# Altium PCB PCB1.PcbDoc
Units mm, origin at the board's own origin, x right, y up, seen from the top; angles counter-clockwise.
Board outline 98.42 x 88.14 mm, 2 copper layers (Top Layer, Bottom Layer); 25 components, 40 nets, 123 pads, 4 vias.
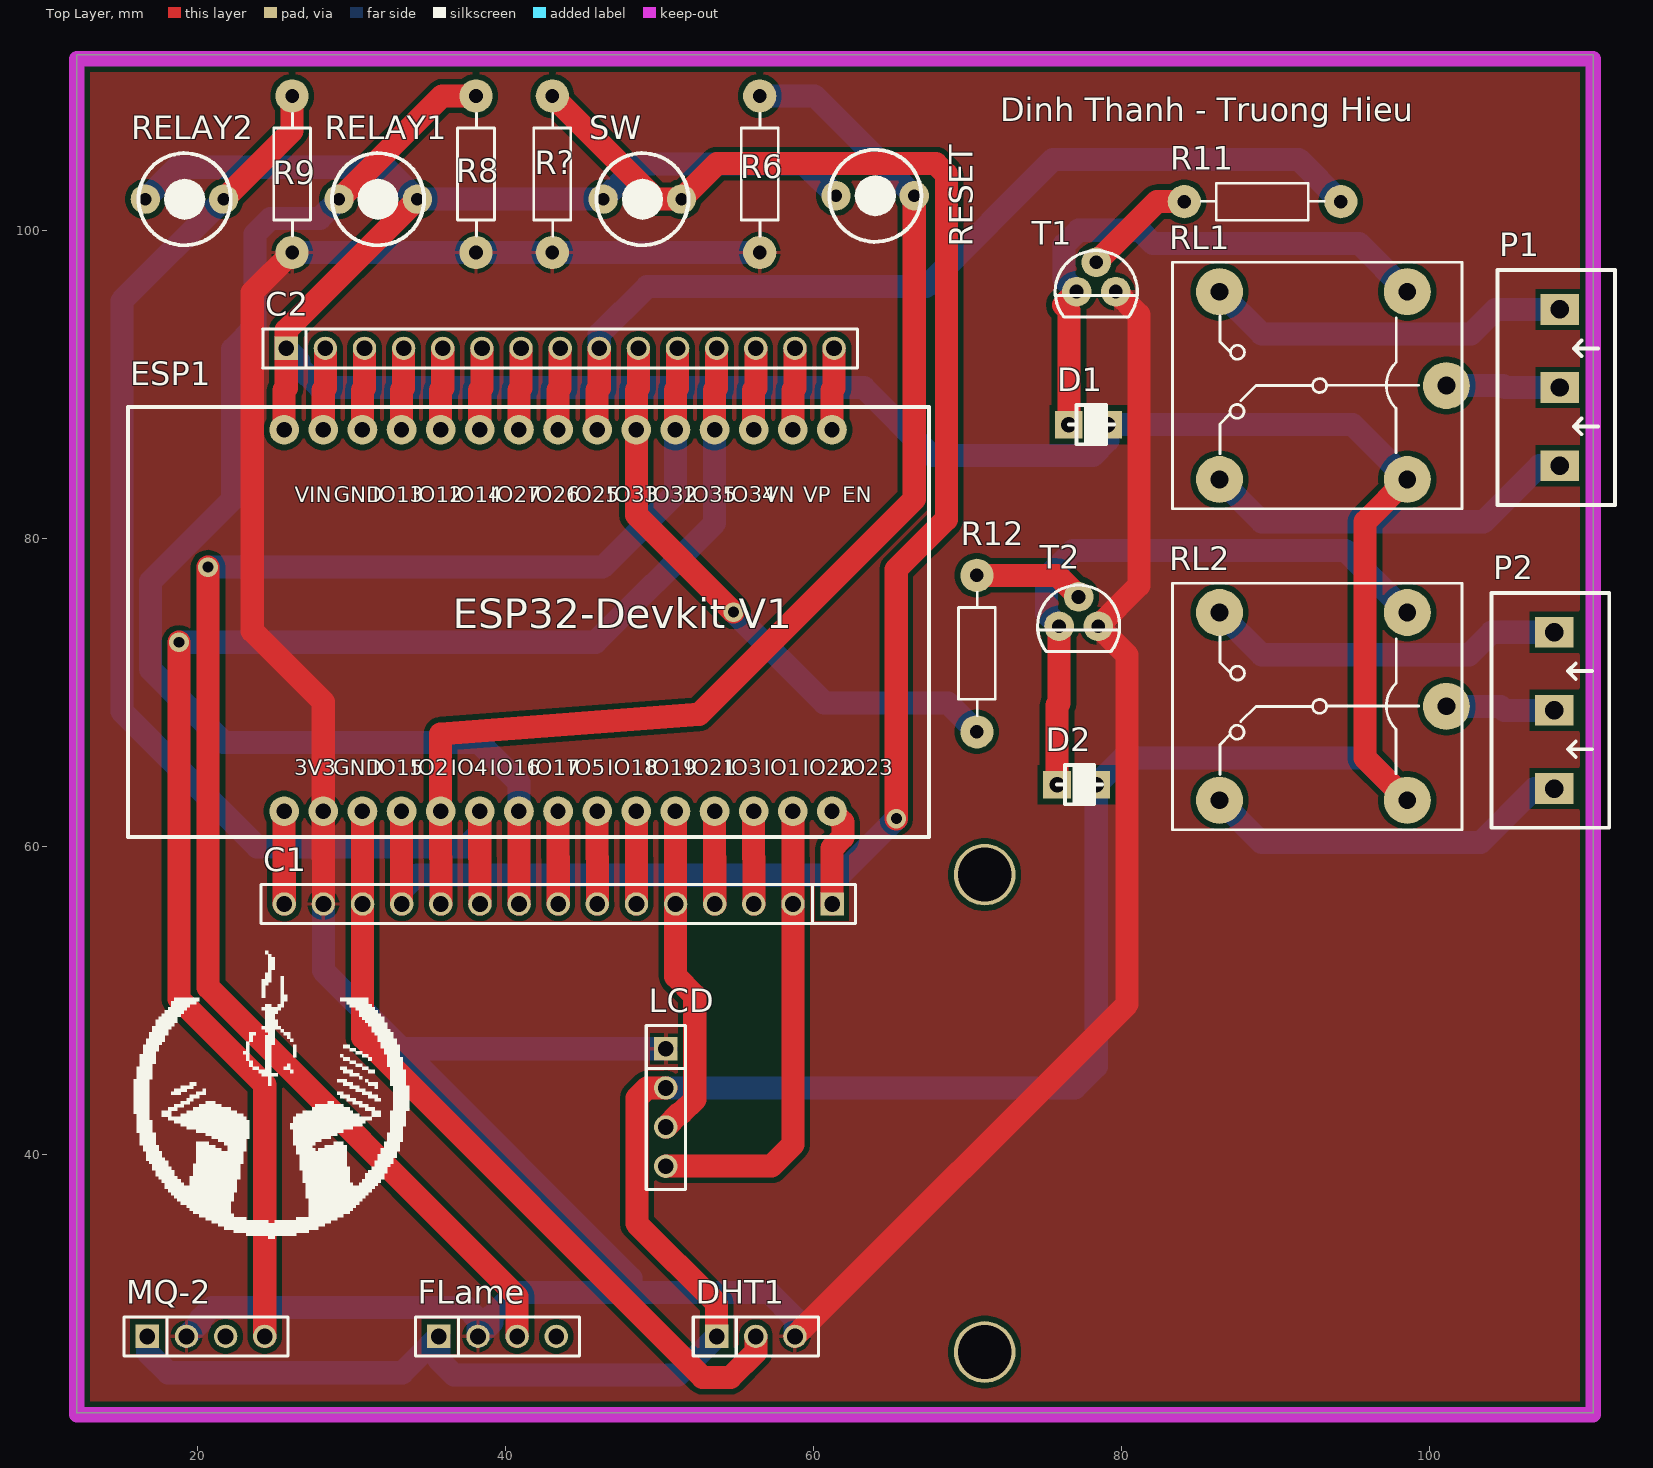
[diagram p0: Top Layer view]
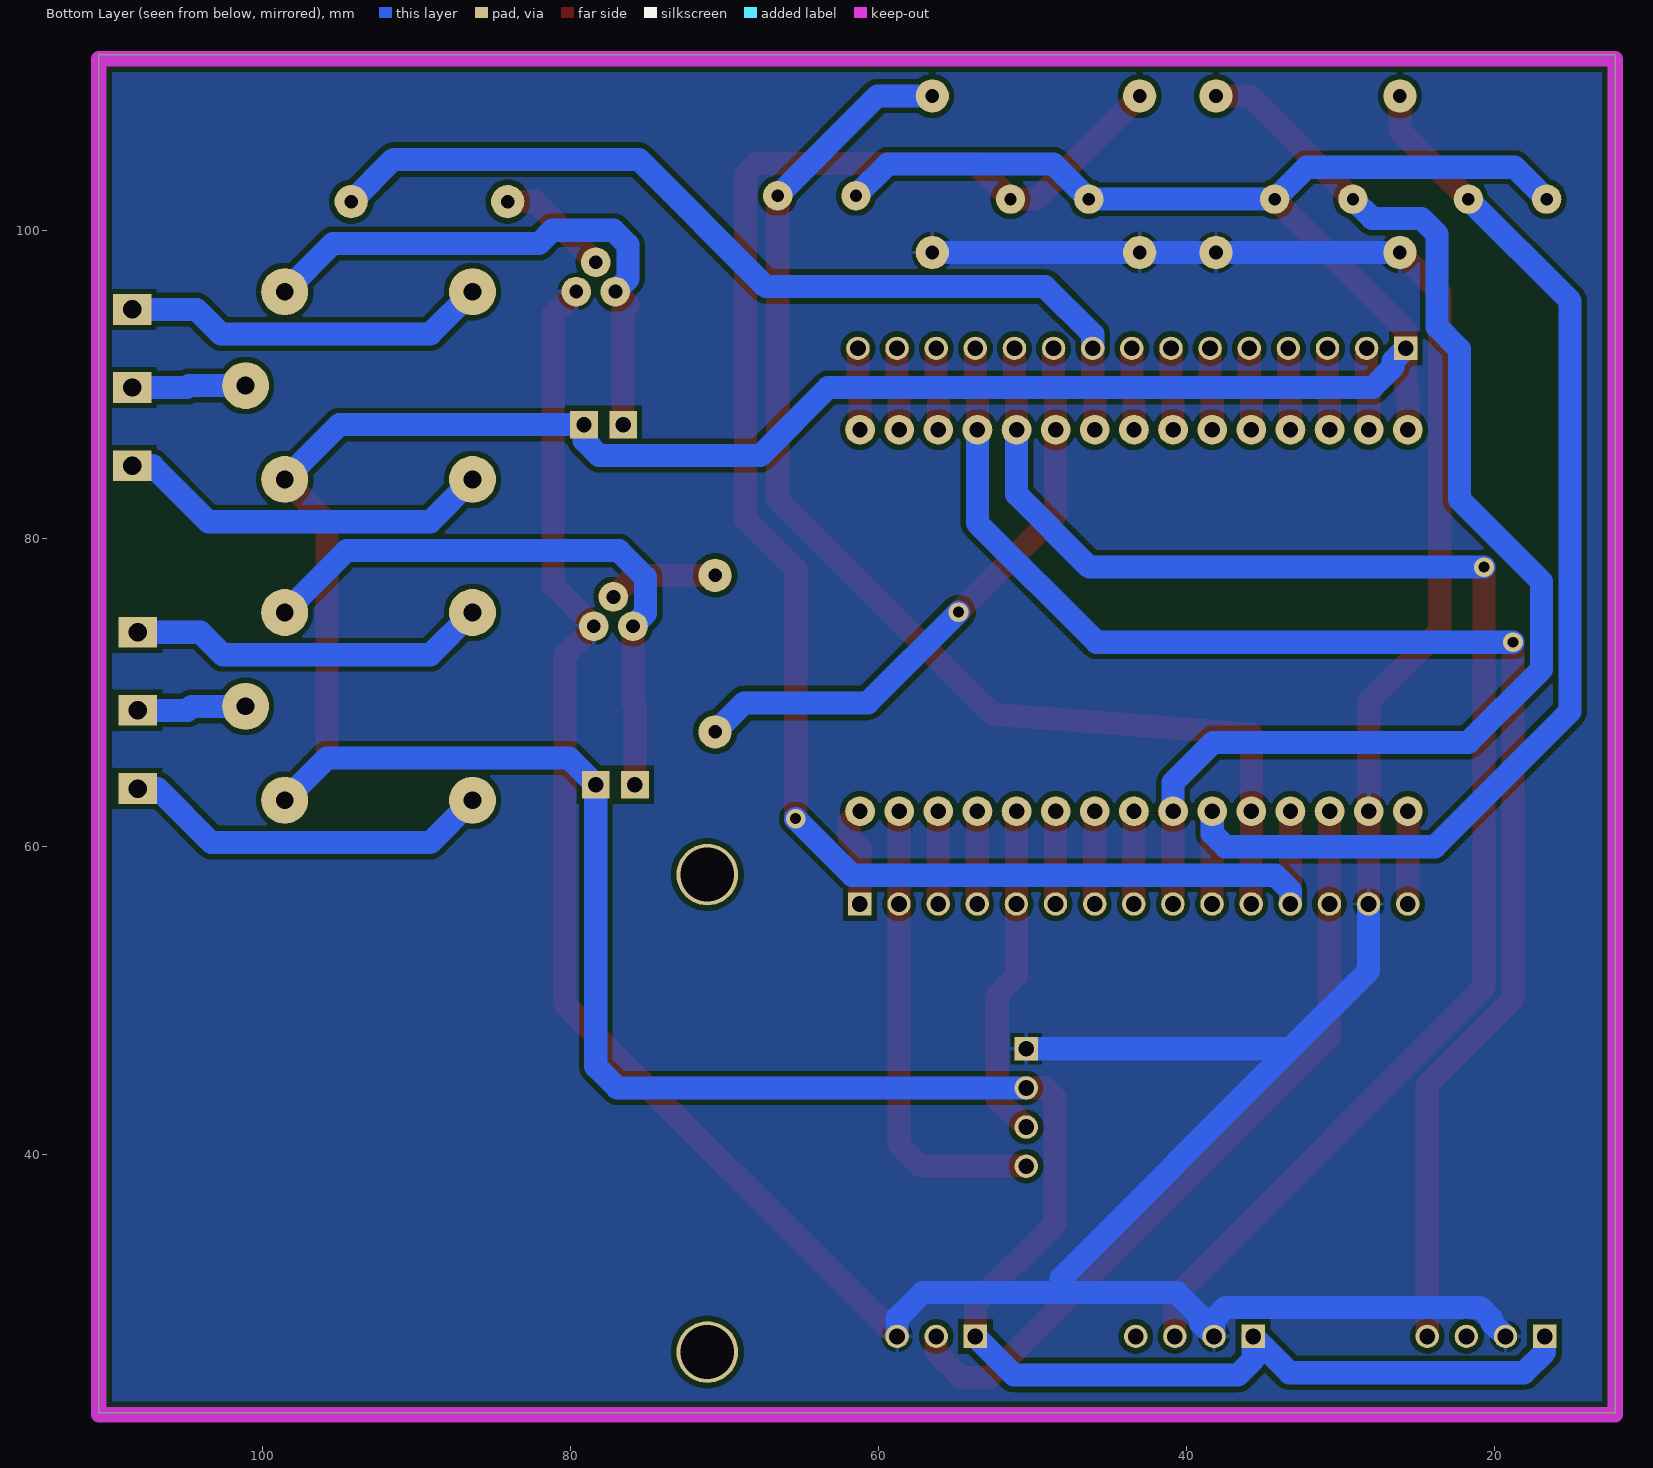
[diagram p1: Bottom Layer view, seen from below]
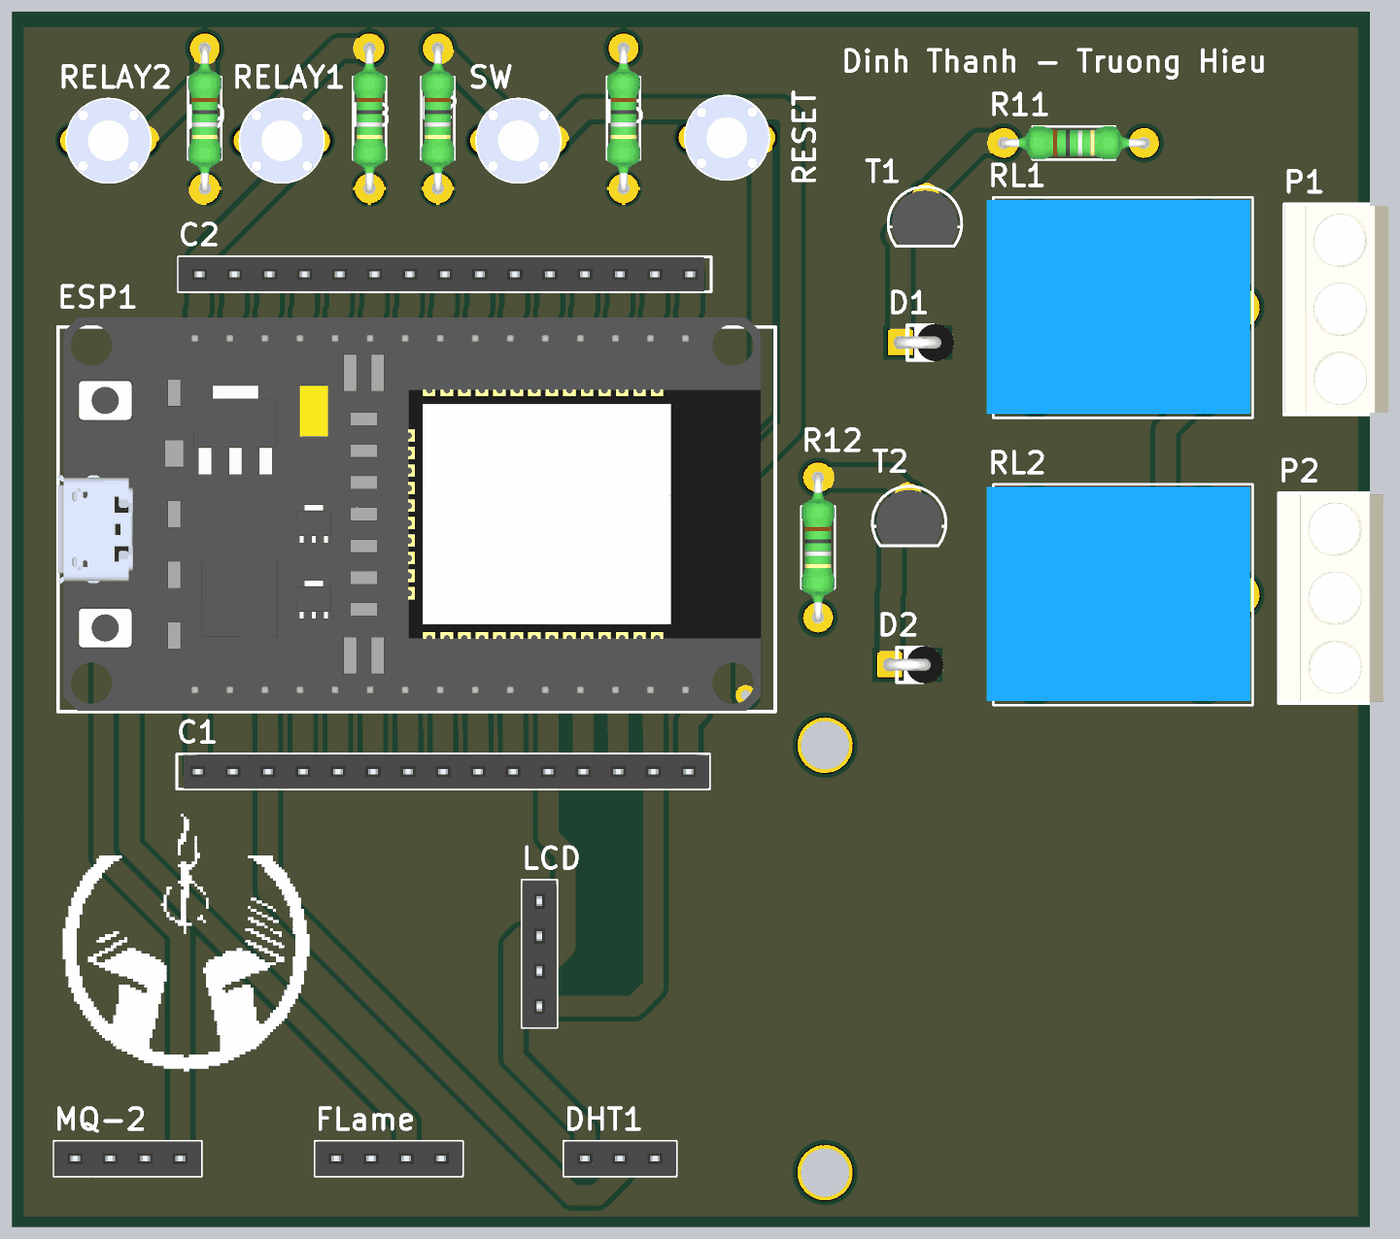
[diagram p2: 3D render of the assembled board from above, using the file's embedded part models]

## Layer stack, top to bottom
Top Solder: solder mask 0.0102, Solder Resist, Dk 3.5
Top Layer: signal copper 0.0356
Dielectric 1: dielectric 0.32, FR-4, Dk 4.8
Bottom Layer: signal copper 0.0356
Bottom Solder: solder mask 0.0102, Solder Resist, Dk 3.5

## Board outline
12.192,23.241 110.617,23.241 110.617,111.379 12.192,111.379

## Design rules (kind name [scope] priority, off if disabled: settings)
Clearance [All] p1: gap=0.355 ignorepadtopadclearanceinfootprint=FALSE
HoleSize [All] p1: absolutevalues=TRUE maxlimit=50.8 minlimit=0.025 maxpercent=80.000 minpercent=20.000
HoleToHoleClearance [All] p1: gap=0.127 allowstackedmicrovias=TRUE
MinimumSolderMaskSliver [All] p1: minsoldermaskwidth=0.127
PolygonConnect [All] p1: connectstyle=Relief reliefconductorwidth=0.254 reliefentries=4 polygonreliefangle="90 Angle" airgapwidth=0.254
RoutingVias [All] p1: holewidth=0.711 width=1.27 viastyle="Through Hole" minholewidth=0.711 minwidth=1.27 maxholewidth=0.711 maxwidth=1.27
SilkToSilkClearance [IsText vs IsPolygon] p1: silktosilkclearance=0.254
SilkToSolderMaskClearance [IsText vs IsPolygon] p1: minsilkscreentomaskgap=0.127 clearancetoexposedcopper=FALSE
SolderMaskExpansion [All] p1: expansion=0.102 istentingtop=FALSE
Width [All] p1: maxlimit=2.54 minlimit=0.254 preferedwidth=1.5 minimp=50.000000 maximp=50.000000 favimp=50.000000
25 further rules are at their usual default settings.

## Components (designator, comment, footprint, x,y, rotation, side; value= is the part's Value field where it differs from the comment)
C1 "JP15" JP15-C1T 61.214,56.261 r180 top
C2 "JP15" JP15-C1T 25.781,92.329 r0 top
D1 "100" "DIODE 1A" 76.581,87.376 r0 top
D2 "100" "DIODE 1A" 75.819,64.008 r0 top
DHT1 "JP 1x3 2.54" "JP 1x3 CT" 53.721,28.194 r0 top
ESP1 "ESP32DEVKITV1" ESP32-DEVKITV1_3D 48.514,75.819 r0 top
FLame "JP 1x4 2.54" "JP 1x4 CT" 35.687,28.194 r0 top (schematic designator FLame1)
LCD "JP 1x4 2.54" "JP 1x4 CT" 50.419,46.863 r270 top
MQ-2 "JP 1x4 2.54" "JP 1x4 CT" 16.764,28.194 r0 top (schematic designator MQ1)
P1 "Header 3 - M" "Medium - Header 3" 108.458,84.709 r90 top
P2 "Header 3 - M" "Medium - Header 3" 108.077,63.754 r90 top
R6 "1k" RES-1/4W 56.642,104.013 r90 top
R8 "1k" RES-1/4W 38.227,104.013 r90 top
R9 "1k" RES-1/4W 26.289,104.013 r90 top
R11 "1k" RES-1/4W 88.773,101.981 r180 top
R12 "1k" RES-1/4W 70.739,72.898 r90 top
R? "1k" RES-1/4W 43.18,104.013 r90 top
RELAY1 "SW" "BUTTON  ROUND" 31.75,102.013 r0 top
RELAY2 "SW" "BUTTON  ROUND" 19.177,102.013 r180 top
RESET "SW" "BUTTON  ROUND" 64.008,102.235 r180 top (schematic designator RESTART)
RL1 "Relay 10A/12V" RL_SPDT_10A 101.092,89.916 r180 top value="Relay SPDT, 10A, 12V"
RL2 "Relay 10A/12V" RL_SPDT_10A 101.092,69.088 r180 top value="Relay SPDT, 10A, 12V"
SW "SW" "BUTTON  ROUND" 48.895,102.013 r180 top
T1 "BC547" TO92 78.359,96.012 r0 top
T2 "BC547" TO92 77.216,74.295 r0 top

## Footprints (in the part's own frame and the unit in brackets; to place one, negate y for a bottom-side part, rotate by r counter-clockwise, add the part's x,y. Pads: shape width x height; smd on the part's side, far side on the other; paste and mask are expansions set on the pad)
"BUTTON  ROUND" [mm]
  round 1.905 / inner round 1.524 / far side round 1.905 hole 0.8 mask+0.205: 1(-2.54,0) 2(2.54,0)
  silkscreen extent -3,-2.99 2.98,2.99, body extent -3,-3 3,3, height 4.5
"DIODE 1A" [mm]
  rect 1.8x1.8 hole 1: 1(0,0) 2(2.54,0)
  silkscreen extent 0,-1.27 2.92,1.27, body extent -0.43,-1.37 3.91,1.36, height 10.64
ESP32-DEVKITV1_3D [mm]
  round 1.93 hole 1: 1(-22.87,-13.54) 2(-20.33,-13.54) 3(-17.79,-13.54) 4(-15.25,-13.54) 5(-12.71,-13.54) 6(-10.17,-13.54) 7(-7.63,-13.54) 8(-5.09,-13.54) 9(-2.55,-13.54) 10(-0.01,-13.54) 11(2.53,-13.54) 12(5.07,-13.54) 13(7.61,-13.54) 14(10.15,-13.54) 15(12.69,-13.54) 16(12.69,11.23) 17(10.15,11.23) 18(7.61,11.23) 19(5.07,11.23) 20(2.53,11.23) 21(-0.01,11.23) 22(-2.55,11.23) 23(-5.09,11.23) 24(-7.63,11.23) 25(-10.17,11.23) 26(-12.71,11.23) 27(-15.25,11.23) 28(-17.79,11.23) 29(-20.33,11.23) 30(-22.87,11.23)
  silkscreen extent -33,-15.2 19,12.7, body extent -33,-15.14 17.93,13.36, height 12.75
JP15-C1T [mm] "15 row, straight, gold plating"
  rect 1.52x1.52 hole 1.02: 1(0,0)
  round 1.52 hole 1.02: 2(2.54,0) 3(5.08,0) 4(7.62,0) 5(10.16,0) 6(12.7,0) 7(15.24,0) 8(17.78,0) 9(20.32,0) 10(22.86,0) 11(25.4,0) 12(27.94,0) 13(30.48,0) 14(33.02,0) 15(35.56,0)
  silkscreen extent -1.52,-1.27 37.08,1.27, body extent -1.52,-1.25 36.58,1.25, height 8.51
"JP 1x3 CT" [mm]
  rect 1.52x1.52 hole 1.02: 1(0,0)
  round 1.52 hole 1.02: 2(2.54,0) 3(5.08,0)
  silkscreen extent -1.52,-1.27 6.6,1.27, body extent -1.52,-1.25 6.6,1.25, height 8.51
"JP 1x4 CT" [mm]
  rect 1.52x1.52 hole 1.02: 1(0,0)
  round 1.52 hole 1.02: 2(2.54,0) 3(5.08,0) 4(7.62,0)
  silkscreen extent -1.52,-1.27 9.14,1.27, body extent -1.52,-1.25 9.14,1.25, height 8.51
"Medium - Header 3" [mm]
  rect 2x2.5 hole 1.2: 1(0,0) 2(5.08,0) 3(10.147,0)
  silkscreen extent -2.54,-3.58 12.7,4.06, body extent -2.42,-3.51 12.58,3.99, height 10
RES-1/4W [mil]
  round 85 hole 35: 1(-215,5) 2(185,5)
  silkscreen extent -173,-42 141,52, body extent -227,-42 197,52, height 95
RL_SPDT_10A [mil] "Relay SPDT, 5 pin, 10A,W 650mil, L 800mil, H 800mil"
  round 120 hole 45: 1(0,0) 2(580,240) 3(580,-240) 4(100,-240) 5(100,240)
  silkscreen extent -40,-315 700,315, body extent -33,-307 719,303, height 642
TO92 [mil]
  round 76 hole 35.43: 1(50,0) 2(0,75) 3(-50,0)
  silkscreen extent -105,-65 105,105, body extent -94,-60 94,94, height 315

## Part data
C1 C2: "WR-PHD 2.54 mm Angled Socket Header", Manufacturer="W¨¹rth Elektronik eiSos GmbH", partNo=613015143121, ComponentLink1 Description=Manufacturer, ComponentLink1URL=http://www.we-online.com, ComponentLink2 Description=Datasheet, ComponentLink2URL=http://katalog.we-online.de/em/datasheet/6130xx143121.pdf, Created by="Karrer Zheng", Created Date="29 March 2013", NoPins=15
D1 D2: library part "Diode 1N4007", "Diode 1N4007 cắm", Chung_Loai=Cắm, Don_Vi=Con, Ma_Hang=MH001063, Ten_Linh_Kien="Diode 1N4007 1A (DIP)"
DHT1: library part "JP 1x3 2.54 Cai Thang", "Cắm", Chung_Loai=Cắm, Don_Vi=Con, Ma_Hang=MH004006, Ten_Linh_Kien="Jump Đơn Cái 2.54MM 1x20P Thẳng"
ESP1: "Dual core, Wi-Fi: 2.4 GHz up to 150 Mbits/s,BLE (Bluetooth Low Energy) and legacy Bluetooth, 32 bits, Up to 240 MHz", Package=Package, Availability=Unavailable, Check_prices=https://www.snapeda.com/parts/ESP32%20DEVKIT%20V1/Do%20it/view-part/5659245/?ref=eda, MF="Do it", MP="ESP32 DEVKIT V1", Price=None, SnapEDA_Link=https://www.snapeda.com/parts/ESP32%20DEVKIT%20V1/Do%20it/view-part/5659245/?ref=snap
FLame LCD MQ-2: library part "JP 1x4 2.54 Cai Thang", "Cắm", Chung_Loai=Cắm, Don_Vi=Con, Ma_Hang=MH004006, Ten_Linh_Kien="Jump Đơn Cái 2.54MM 1x20P Thẳng"
P1 P2: "Header, 3-Pin, Medium", LatestRevisionDate=17-Jul-2002, LatestRevisionNote="Re-released for DXP Platform.", Publisher="Altium Limited"
R6 R8 R9 R11 R12 R?: library part R, "Resistor R1/4W"
RELAY1 RELAY2 RESET SW: library part SW-Button, "Switch-Button", LatestRevisionDate=17-Jul-2002, LatestRevisionNote="Re-released for DXP Platform.", PackageReference=SPST-2, Published=24-Mar-1999, Publisher="Altium Limited"
RL1 RL2: library part "Relay 1", "Relay SPDT,10A - 12VDC 5 Pin"
T1 T2: "Bipolar (BJT) Transistor NPN 45V 100mA 300MHz 625mW Through Hole TO-92 (TO-226)", Package="E-PKG AXIAL-LEADED-2 ON Semiconductor", Availability="In Stock", Check_prices=https://www.snapeda.com/parts/BC547/Onsemi/view-part/?ref=eda, MF=ON, MP=BC547, Price=None, Purchase-URL=https://pricing.snapeda.com/search/part/BC547/?ref=eda, SnapEDA_Link=https://www.snapeda.com/parts/BC547/Onsemi/view-part/?ref=snap

## Free pads (board coordinates)
  round 4 hole 3.5: 14(71.12,58.166) 15(71.12,27.178)

## Via types
v1: diameter 1.27, hole 0.711, Top Layer to Bottom Layer, 4 vias

## Nets (pads, with @x,y where several pads share a name; then routed paths per layer and width w, separated by ;. In a path a pad name is that pad's centre, name@x,y a point inside that pad or via, vN(x,y) a via of type N, cw(c..) or ccw(c..) an arc to the next point about the centre after c; other vN are vias at no path point)
5V: C2.1 D1.2 D2.2 DHT1.1 ESP1.30 FLame.1 LCD.2 MQ-2.1 RELAY1.2 RELAY2.2 RESET.2 RL1.5 RL2.5 SW.2 | length 299.9
  Top Layer w1.5: ESP1.30 25.644,89.611 25.781,89.748 C2.1 25.781,93.504 RELAY1.2 ; LCD.2 49.2,44.323 48.539,43.663 48.539,35.514 53.721,30.332 DHT1.1 ; RL2.5 95.809,65.735 95.809,81.077 RL1.5
  Bottom Layer w1.5: RELAY2.2 18.714,104.089 32.213,104.089 RELAY1.2 SW.2 48.635,104.292 59.411,104.292 RESET.2 ; MQ-2.1 16.764,27.178 18.11,25.832 33.325,25.832 FLame.1 35.687,26.67 36.678,25.679 51.206,25.679 DHT1.1 ; C2.1 26.619,91.491 26.619,91.11 27.94,89.789 63.271,89.789 67.691,85.369 78.13,85.369 79.121,86.36 D1.2 94.996,87.376 RL1.5 ; LCD.2 76.962,44.323 78.359,45.72 D2.2 80.086,65.735 95.809,65.735 RL2.5
DHT11: C1.13 DHT1.2 ESP1.3 | length 51.1
  Top Layer w1.5: ESP1.3 30.724,59.268 30.734,59.258 C1.13 30.734,47.6 52.807,25.527 54.61,25.527 56.261,27.178 DHT1.2
FLAME: C2.11 ESP1.20 FLame.3 | length 100.1
  Top Layer w1.5: v1(20.703,78.13) 20.703,50.849 40.767,30.785 FLame.3 ; ESP1.20 51.044,89.611 51.181,89.748 C2.11
  Bottom Layer w1.5: v1(20.703,78.13) 46.32,78.13 51.044,82.855 ESP1.20
GND: C1.14 DHT1.3 ESP1.2 FLame.2 LCD.1 MQ-2.2 R6.1 R8.1 R9.1 R?.1 T1.1 T2.1 | length 250.7
  Top Layer w1.5: R9.1 23.571,95.961 23.571,73.99 28.184,69.377 ESP1.2 28.184,59.268 28.194,59.258 C1.14 ; DHT1.3 80.366,49.759 80.366,72.415 T2.1 81.128,76.937 81.128,94.513 T1.1
  Bottom Layer w1.5: MQ-2.2 20.218,29.108 20.218,29.337 20.955,30.074 37.465,30.074 38.227,29.312 FLame.2 39.141,29.108 39.141,29.54 40.64,31.039 48.158,31.039 ; R9.1 R8.1 R?.1 R6.1 ; C1.14 28.194,51.943 33.274,46.863 ; LCD.1 33.274,46.863 ; DHT1.3 58.801,29.388 57.15,31.039 48.158,31.039 ; 33.274,46.863 48.158,31.979 48.158,31.039
MQ2: C2.12 ESP1.19 MQ-2.4 | length 96.7
  Top Layer w1.5: v1(18.821,73.254) 18.821,50.089 24.384,44.526 MQ-2.4 ; ESP1.19 53.584,89.611 53.721,89.748 C2.12
  Bottom Layer w1.5: v1(18.821,73.254) 45.847,73.254 53.584,80.991 ESP1.19
NetC1_1: C1.1 ESP1.15 | length 6.6
  Top Layer w1.5: ESP1.15 61.912,61.571 61.912,60.58 61.214,59.881 C1.1
NetC1_3: C1.3 ESP1.13 | length 6
  Top Layer w1.5: ESP1.13 56.124,59.268 56.134,59.258 C1.3
NetC1_4: C1.4 ESP1.12 | length 6
  Top Layer w1.5: ESP1.12 53.584,59.268 53.594,59.258 C1.4
NetC1_6: C1.6 ESP1.10 | length 6
  Top Layer w1.5: ESP1.10 48.504,59.268 48.514,59.258 C1.6
NetC1_7: C1.7 ESP1.9 | length 6
  Top Layer w1.5: ESP1.9 45.964,59.268 45.974,59.258 C1.7
NetC1_8: C1.8 ESP1.8 | length 6
  Top Layer w1.5: ESP1.8 43.424,59.268 43.434,59.258 C1.8
NetC1_15: C1.15 ESP1.1 | length 6
  Top Layer w1.5: ESP1.1 25.644,59.268 25.654,59.258 C1.15
NetC2_2: C2.2 ESP1.29 | length 5.3
  Top Layer w1.5: ESP1.29 28.184,89.611 28.321,89.748 C2.2
NetC2_3: C2.3 ESP1.28 | length 5.3
  Top Layer w1.5: ESP1.28 30.724,89.611 30.861,89.748 C2.3
NetC2_4: C2.4 ESP1.27 | length 5.3
  Top Layer w1.5: ESP1.27 33.264,89.611 33.401,89.748 C2.4
NetC2_5: C2.5 ESP1.26 | length 5.3
  Top Layer w1.5: ESP1.26 35.804,89.611 35.941,89.748 C2.5
NetC2_6: C2.6 ESP1.25 | length 5.3
  Top Layer w1.5: ESP1.25 38.344,89.611 38.481,89.748 C2.6
NetC2_7: C2.7 ESP1.24 | length 5.3
  Top Layer w1.5: ESP1.24 40.884,89.611 41.021,89.748 C2.7
NetC2_8: C2.8 ESP1.23 | length 5.3
  Top Layer w1.5: ESP1.23 43.424,89.611 43.561,89.748 C2.8
NetC2_13: C2.13 ESP1.18 | length 5.3
  Top Layer w1.5: ESP1.18 56.124,89.611 56.261,89.748 C2.13
NetC2_14: C2.14 ESP1.17 | length 5.3
  Top Layer w1.5: ESP1.17 58.664,89.611 58.801,89.748 C2.14
NetC2_15: C2.15 ESP1.16 | length 5.3
  Top Layer w1.5: ESP1.16 61.204,89.611 61.341,89.748 C2.15
NetD1_1: D1.1 RL1.4 T1.3 | length 36.8
  Top Layer w1.5: D1.1 76.581,94.793 76.225,95.148 T1.3
  Bottom Layer w1.5: T1.3 76.276,96.825 76.276,99.06 77.216,100 81.178,100 82.042,99.136 95.428,99.136 RL1.4
NetD2_1: D2.1 RL2.4 T2.3 | length 39.6
  Top Layer w1.5: D2.1 75.819,69.164 75.946,69.291 T2.3
  Bottom Layer w1.5: T2.3 75.133,75.108 75.133,77.47 76.86,79.197 94.539,79.197 RL2.4
NetP1_1: P1.1 RL1.2 | length 24.7
  Bottom Layer w1.5: RL1.2 89.103,81.077 103.505,81.077 107.137,84.709 P1.1
NetP1_2: P1.2 RL1.1 | length 7.4
  Bottom Layer w1.5: RL1.1 104.775,89.916 104.902,89.789 P1.2
NetP1_3: P1.3 RL1.3 | length 23.9
  Bottom Layer w1.5: RL1.3 89.103,93.269 102.692,93.269 104.28,94.856 P1.3
NetP2_1: P2.1 RL2.2 | length 24.3
  Bottom Layer w1.5: RL2.2 89.103,60.249 103.302,60.249 106.807,63.754 P2.1
NetP2_2: P2.2 RL2.1 | length 7.1
  Bottom Layer w1.5: RL2.1 104.597,69.088 104.851,68.834 P2.2
NetP2_3: P2.3 RL2.3 | length 23.5
  Bottom Layer w1.5: RL2.3 89.103,72.441 102.565,72.441 104.026,73.901 P2.3
NetR11_2: R11.2 T1.2 | length 7.3
  Top Layer w1.5: T1.2 82.296,101.854 R11.2
NetR12_2: R12.2 T2.2 | length 7.2
  Top Layer w1.5: R12.2 75.819,77.597 T2.2
R1: C1.10 ESP1.6 R9.2 RELAY2.1 | length 79.2
  Top Layer w1.5: RELAY2.1 26.162,106.458 R9.2 ; ESP1.6 38.344,59.268 38.354,59.258 C1.10
  Bottom Layer w1.5: RELAY2.1 15.111,95.407 15.111,68.759 23.89,59.981 37.477,59.981 38.344,60.848 ESP1.6
R2: C1.9 ESP1.7 R8.2 RELAY1.1 | length 84
  Top Layer w1.5: RELAY1.1 35.909,108.712 R8.2 ; ESP1.7 40.884,59.268 40.894,59.258 C1.9
  Bottom Layer w1.5: RELAY1.1 27.959,100.762 24.765,100.762 23.749,99.746 23.749,93.726 22.301,92.278 22.301,82.525 16.966,77.191 16.966,71.501 21.716,66.751 38.283,66.751 40.884,64.15 ESP1.7
RESTART: C1.11 ESP1.5 R6.2 RESET.1 | length 80
  Top Layer w1.5: C1.11 35.814,59.258 35.804,59.268 ESP1.5 35.804,67.31 52.578,68.58 66.548,82.55 RESET.1
  Bottom Layer w1.5: R6.2 60.071,108.712 RESET.1
RL1: C2.9 ESP1.22 R11.1 | length 60.2
  Top Layer w1.5: ESP1.22 45.964,89.611 46.101,89.748 C2.9
  Bottom Layer w1.5: C2.9 46.101,93.243 49.2,96.342 67.31,96.342 75.565,104.597 91.491,104.597 R11.1
RL2: C2.10 ESP1.21 R12.1 | length 38.8
  Top Layer w1.5: C2.10 48.641,89.748 48.504,89.611 ESP1.21 48.504,81.519 v1(54.813,75.209)
  Bottom Layer w1.5: v1(54.813,75.209) 60.706,69.317 68.732,69.317 R12.1
SCL: C1.2 ESP1.14 LCD.4 | length 30.5
  Top Layer w1.5: LCD.4 57.277,39.243 58.674,40.64 C1.2 58.674,59.258 58.664,59.268 ESP1.14
SDA: C1.5 ESP1.11 LCD.3 | length 21.9
  Top Layer w1.5: LCD.3 51.333,42.697 51.435,42.697 52.299,43.561 52.299,50.317 51.054,51.562 C1.5 51.054,59.258 51.044,59.268 ESP1.11
switchpage: C1.12 ESP1.4 R?.2 SW.1 | length 113.7
  Top Layer w1.5: ESP1.4 33.264,59.268 33.274,59.258 C1.12 ; R?.2 49.753,102.013 SW.1 53.74,104.318 67.945,104.318 68.631,103.632 68.631,81.229 65.38,77.978 v1(65.38,61.798)
  Bottom Layer w1.5: C1.12 33.274,57.15 34.25,58.126 61.707,58.126 v1(65.38,61.798)
pads on no net: FLame.4 MQ-2.3

## Polygon pours and split planes (outlines as drawn)
GND on Bottom Layer "GND_L02_P001" (solid, remove dead copper, pour order 1): 12.192,111.379 110.617,111.379 110.617,23.241 12.192,23.241
GND on Top Layer "GND_L01_P000" (solid, remove dead copper, pour order 0): 12.192,111.379 110.617,111.379 110.617,23.241 12.192,23.241

## Keep-outs
Keep-Out Layer:
  lines w1: 12.192,23.114 110.617,23.114 110.617,111.125 12.192,111.125 12.192,23.114

## Silkscreen, mask and mechanical layers (free items; w line width, h text height)
Top Overlay:
  drawing of 13 lines, arcs and shapes, not listed
  text "Dinh Thanh - Truong Hieu" at 72.136,107.061 h1.52

## Text inside footprints (layer, text, board x,y; h text height)
ESP1: Top Overlay "3V3" at 26.304,64.619 h1.02; Top Overlay "GND" at 28.844,64.619 h1.02; Top Overlay "IO15" at 31.384,64.619 h1.02; Top Overlay "IO2" at 33.924,64.619 h1.02; Top Overlay "IO4" at 36.464,64.619 h1.02; Top Overlay "IO16" at 39.004,64.619 h1.02; Top Overlay "IO17" at 41.544,64.619 h1.02; Top Overlay "IO5" at 44.084,64.619 h1.02; Top Overlay "IO18" at 46.624,64.619 h1.02; Top Overlay "IO19" at 49.164,64.619 h1.02; Top Overlay "IO21" at 51.704,64.619 h1.02; Top Overlay "IO3" at 54.244,64.619 h1.02; Top Overlay "IO1" at 56.784,64.619 h1.02; Top Overlay "IO22" at 59.324,64.619 h1.02; Top Overlay "IO23" at 61.864,64.619 h1.02; Top Overlay "VIN" at 26.324,82.339 h1.02; Top Overlay "GND" at 28.864,82.339 h1.02; Top Overlay "IO13" at 31.404,82.339 h1.02; Top Overlay "IO12" at 33.944,82.339 h1.02; Top Overlay "IO14" at 36.484,82.339 h1.02; Top Overlay "IO27" at 39.024,82.339 h1.02; Top Overlay "IO26" at 41.564,82.339 h1.02; Top Overlay "IO25" at 44.104,82.339 h1.02; Top Overlay "IO33" at 46.644,82.339 h1.02; Top Overlay "IO32" at 49.184,82.339 h1.02; Top Overlay "IO35" at 51.724,82.339 h1.02; Top Overlay "IO34" at 54.264,82.339 h1.02; Top Overlay "VN" at 56.804,82.339 h1.02; Top Overlay "VP" at 59.344,82.339 h1.02; Top Overlay "EN" at 61.884,82.339 h1.02; Top Overlay "ESP32-Devkit V1" at 36.576,74.168 h1.93
T1: Mechanical 13 "2" at 77.724,96.647 h1.42; Mechanical 13 "3" at 76.2,96.012 h1.42; Mechanical 13 "1" at 79.502,96.012 h1.42
T2: Mechanical 13 "2" at 76.581,74.93 h1.42; Mechanical 13 "3" at 75.057,74.295 h1.42; Mechanical 13 "1" at 78.359,74.295 h1.42